# Altium PCB DEMO.PcbDoc
Units mm, origin at the board's own origin, x right, y up, seen from the top; angles counter-clockwise.
Board outline 100 x 100 mm, 2 copper layers (Top Layer, Bottom Layer); 33 components, 19 nets, 75 pads, 4 vias.
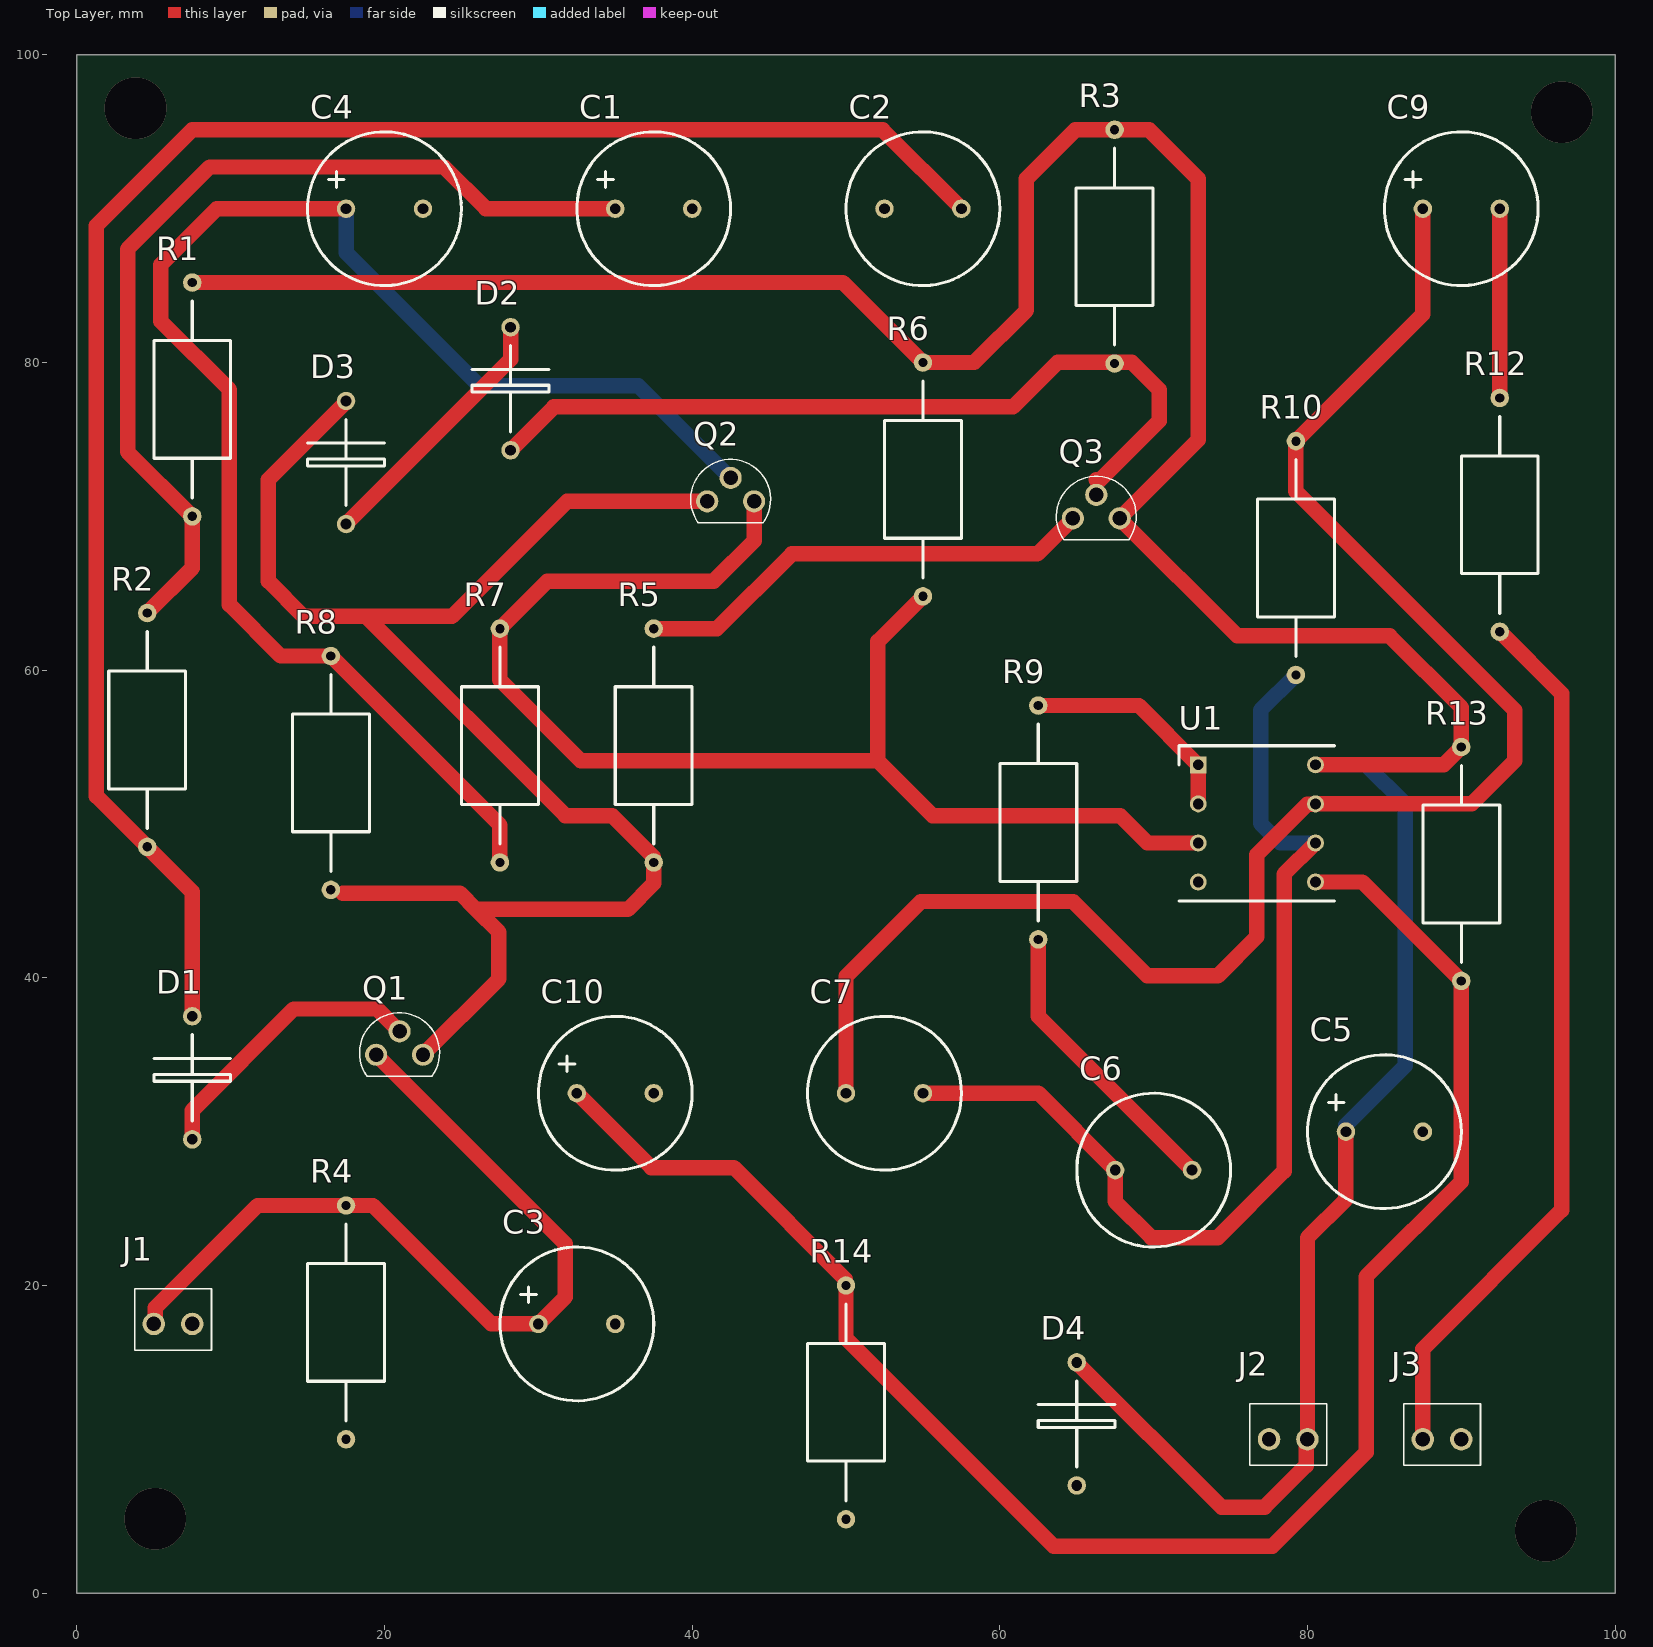
[diagram p0: Top Layer view]
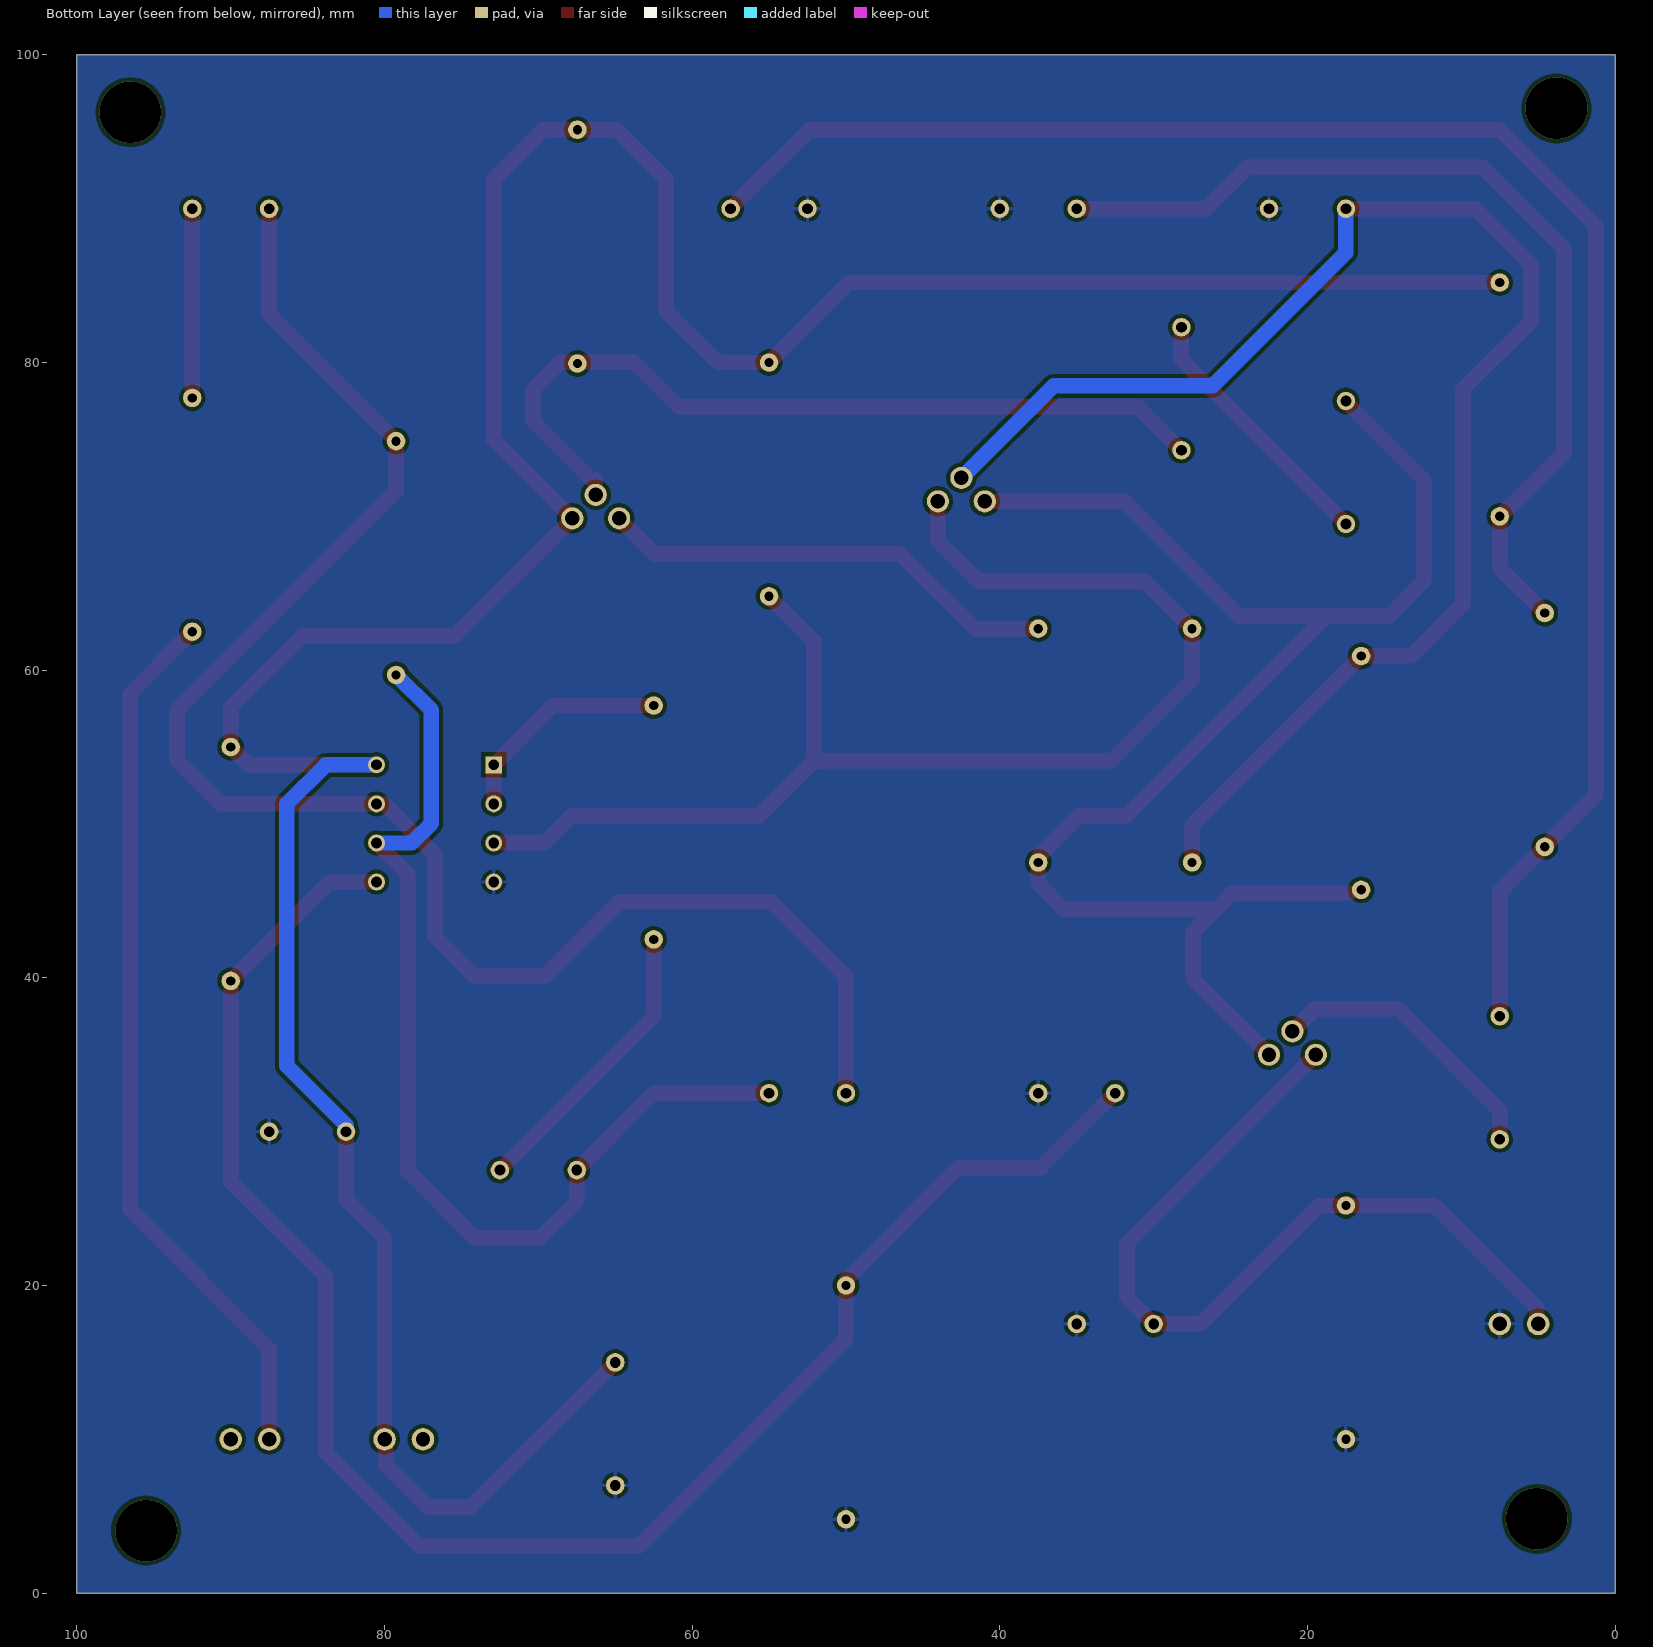
[diagram p1: Bottom Layer view, seen from below]

## Layer stack, top to bottom
Top Solder: solder mask 0.0102, Solder Resist, Dk 3.5
Top Layer: signal copper 0.0356
Dielectric 1: dielectric 0.32, FR-4, Dk 4.8
Bottom Layer: signal copper 0.0356
Bottom Solder: solder mask 0.0102, Solder Resist, Dk 3.5

## Board outline
0,100 100,100 100,0 0,0

## Design rules (kind name [scope] priority, off if disabled: settings)
Clearance [All] p1: gap=0.254 ignorepadtopadclearanceinfootprint=FALSE except(0: Arc-Hole Track-Hole SMDPad-Hole THPad-Hole Via-Hole Fill-Hole Poly-Hole Region-Hole Text-Hole)
HoleSize [All] p1: absolutevalues=TRUE maxlimit=4 minlimit=0.025 maxpercent=80.000 minpercent=20.000
PolygonConnect [All] p1: connectstyle=Relief reliefconductorwidth=0.254 reliefentries=4 polygonreliefangle="90 Angle" airgapwidth=0.254
RoutingVias [All] p1: holewidth=0.711 width=1.27 viastyle="Through Hole" minholewidth=0.711 minwidth=1.27 maxholewidth=0.711 maxwidth=1.27
SolderMaskExpansion [All] p1: expansion=0.102 istentingtop=FALSE
Width [All] p1: maxlimit=1 minlimit=0.254 preferedwidth=1 minimp=50.000000 maximp=50.000000 favimp=50.000000
29 further rules are at their usual default settings.

## Components (designator, comment, footprint, x,y, rotation, side; value= is the part's Value field where it differs from the comment)
C1 "Cap Pol1" "Capacitor - Pol" 35,90 r0 top value=10uF
C2 "Cap" Capacitor 52.5,90 r0 top value=0.1uF
C3 "Cap Pol1" "Capacitor - Pol" 30,17.5 r0 top value=47uF
C4 "Cap Pol1" "Capacitor - Pol" 17.5,90 r0 top value=2.2uF
C5 "Cap Pol1" "Capacitor - Pol" 82.5,30 r0 top value=47uF
C6 "Cap" Capacitor 67.5,27.5 r0 top value=0.01uF
C7 "Cap" Capacitor 50,32.5 r0 top value=47pF
C9 "Cap Pol1" "Capacitor - Pol" 87.5,90 r0 top value=1uF
C10 "Cap Pol1" "Capacitor - Pol" 32.5,32.5 r0 top value=10uF
D1 "Photodiode" Diode 7.5,29.5 r90 top
D2 "Diode 1N5408" Diode 28.194,74.296 r90 top
D3 "Diode 1N5408" Diode 17.5,69.5 r90 top
D4 "Diode 1N5408" Diode 65,7 r90 top
J1 "Jumper" JUMPER 5,17.5 r0 top
J2 "Jumper" JUMPER 77.5,10 r0 top
J3 "Jumper" JUMPER 87.5,10 r0 top
Q1 "JFET-N" TRANSISTOR 19.706,35.127 r0 top
Q2 "NPN" TRANSISTOR 41.23,71.103 r0 top
Q3 "NPN" TRANSISTOR 65,70 r0 top
R1 "Res1" "RES - Axial 0.6" 7.5,70 r90 top value=100K
R2 "Res1" "RES - Axial 0.6" 4.572,48.514 r90 top value=220K
R3 "Res1" "RES - Axial 0.6" 67.464,79.934 r90 top value=47K
R4 "Res1" "RES - Axial 0.6" 17.5,10 r90 top value=10
R5 "Res1" "RES - Axial 0.6" 37.5,47.5 r90 top value=120
R6 "Res1" "RES - Axial 0.6" 55,64.8 r90 top value=15K
R7 "Res1" "RES - Axial 0.6" 27.5,47.5 r90 top value=47K
R8 "Res1" "RES - Axial 0.6" 16.51,45.72 r90 top value=47K
R9 "Res1" "RES - Axial 0.6" 62.5,42.5 r90 top value=2.2K
R10 "Res1" "RES - Axial 0.6" 79.248,74.89 r270 top value=330K
R12 "Res1" "RES - Axial 0.6" 92.5,62.5 r90 top value=47
R13 "Res1" "RES - Axial 0.6" 90,39.8 r90 top value=100K
R14 "Res1" "RES - Axial 0.6" 50,4.8 r90 top value=100K
U1 "LM833N/NOPB" DIP8 72.898,53.848 r0 top

## Footprints (in the part's own frame and the unit in brackets; to place one, negate y for a bottom-side part, rotate by r counter-clockwise, add the part's x,y. Pads: shape width x height; smd on the part's side, far side on the other; paste and mask are expansions set on the pad)
Capacitor [mm]
  round 1.2 hole 0.7: 1(0,0) 2(5,0)
  silkscreen extent -2.5,-5 7.5,5
"Capacitor - Pol" [mm]
  round 1.2 hole 0.7: 1(0,0) 2(5,0)
  silkscreen extent -2.5,-5 7.5,5
Diode [mm]
  round 1.2 hole 0.7: 1(0,0) 2(8,0)
  silkscreen extent 1.2,-2.5 6.8,2.5
DIP8 [mm]
  rect 1.1x1.1 hole 0.7: 1(0,0)
  round 1.1 hole 0.7: 2(0,-2.54) 3(0,-5.08) 4(0,-7.62) 5(7.62,-7.62) 6(7.62,-5.08) 7(7.62,-2.54) 8(7.62,0)
  silkscreen extent -1.24,-8.86 8.86,1.24
JUMPER [mm]
  round 1.462 hole 0.94: 1(0,0) 2(2.5,0)
  silkscreen extent -1.25,-1.7 3.75,2.3, body extent -1.25,-1.7 3.75,2.3, height 7.7
"RES - Axial 0.6" [mm]
  round 1.2 hole 0.6: 1(0,0) 2(15.2,0)
  silkscreen extent 1.2,-2.5 14,2.5
TRANSISTOR [mm]
  round 1.44 hole 0.94: 1(2.794,-0.127) 2(1.27,1.397) 3(-0.254,-0.127)
  silkscreen extent -1.33,-1.53 3.87,2.6

## Part data
C1 C3 C4 C5 C9 C10: "Polarized Capacitor (Radial)", LatestRevisionDate=17-Jul-2002, LatestRevisionNote="Re-released for DXP Platform.", PackageDescription="Polarized Capacitor (Radial); 2 Leads", PackageReference=RB7.6-15, Published=8-Jun-2000, Publisher="Altium Limited"
C2 C6 C7: "Capacitor", LatestRevisionDate=17-Jul-2002, LatestRevisionNote="Re-released for DXP Platform.", PackageDescription="Radial Cap, Thru-Hole; 2 Leads; 0.3 in Pin Spacing", PackageReference=RAD-0.3, Published=8-Jun-2000, Publisher="Altium Limited"
D2 D3 D4: "3 Amp Medium Power Silicon Rectifier Diode", ComponentLink1Description="Manufacturer Link", ComponentLink1URL=http://www.irf.com/, DatasheetVersion=Aug-1984, LatestRevisionDate=17-Jul-2002, LatestRevisionNote="Re-released for DXP Platform.", PackageDescription="Diode, Axial; Body 9.5 x 5.3 mm (LxDia. max), Lead Dia. 1.32 mm (max)", PackageReference=DO-201AD, Published=8-Jun-2000, Publisher="Altium Limited"
Q1: "N-Channel JFET", Code_JEDEC=TO-254-AA, LatestRevisionDate=17-Jul-2002, LatestRevisionNote="Re-released for DXP Platform.", PackageReference=TO-254-AA, Published=8-Jun-2000, Publisher="Altium Limited"
Q2 Q3: "NPN Bipolar Transistor", Code_JEDEC=TO-226-AA, LatestRevisionDate=17-Jul-2002, LatestRevisionNote="Re-released for DXP Platform.", PackageDescription="TO, Flat Index; 3 In-Line, Axial Leads; Body Dia. 4.8mm; Leads 0.55 x 0.51 mm (max)", PackageReference=TO-226-AA, Published=8-Jun-2000, Publisher="Altium Limited"
R1 R2 R3 R4 R5 R6 R7 R8 R9 R10 R12 R13 R14: "Resistor", LatestRevisionDate=17-Jul-2002, LatestRevisionNote="Re-released for DXP Platform.", PackageDescription="Axial Device, Thru-Hole; 2 Leads; 0.3 in Pin Spacing", PackageReference=AXIAL-0.3, Published=8-Jun-2000, Publisher="Altium Limited"
U1: "AUDIO AMPLIFIER", Case/Package=PDIP, Dual Supply Voltage=9V, Input Bias Current=1uA, Input Offset Voltage (Vos)=5mV, Manufacturer="TI National Semiconductor", Max Dual Supply Voltage=18V, Max Operating Temperature=85°C, Min Dual Supply Voltage=5V, Min Operating Temperature=-40°C, Nominal Supply Current=5mA, Output Current=40mA, Package Quantity=40, Power Dissipation=500mW, Power Supply Rejection Ratio (PSRR)=80dB, Supplier Part Number 1=926-LM833N/NOPB, Voltage Gain=110dB, Category="Amplifiers - Op Amps, Buffer, Instrumentation", Common Mode Rejection Ratio=80dB, ComponentLink1Description=https://datasheet.ciiva.com/2973/lm833-n-2973456.pdf?src-supplier=Avnet, ComponentLink1URL=https://datasheet.ciiva.com/2973/lm833-n-2973456.pdf?src-supplier=Avnet, ComponentLink2Description=https://datasheet.ciiva.com/4755/lm833-n-220371-4755091.pdf?src-supplier=Mouser, ComponentLink2URL=https://datasheet.ciiva.com/4755/lm833-n-220371-4755091.pdf?src-supplier=Mouser, ComponentLink3Description=https://datasheet.ciiva.com/1482/1814449-1482436.pdf?src-supplier=Element14, ComponentLink3URL=https://datasheet.ciiva.com/1482/1814449-1482436.pdf?src-supplier=Element14, ComponentLink4Description=https://datasheet.ciiva.com/14153/mnlm833-e-14153231.pdf?src-supplier=Distrelec, ComponentLink4URL=https://datasheet.ciiva.com/14153/mnlm833-e-14153231.pdf?src-supplier=Distrelec, ComponentLink5Description=https://datasheet.ciiva.com/6630/lm833-n-6630645.pdf?src-supplier=Digi-Key, ComponentLink5URL=https://datasheet.ciiva.com/6630/lm833-n-6630645.pdf?src-supplier=Digi-Key, Gain Bandwidth Product=15MHz, Height=3.3mm, Lead Free="Lead Free", Length=9.27mm, Load Impedance=2kR, Manufacturer Part Number=LM833N/NOPB, Mount="Through Hole", Number of Channels=2, Number of Circuits=2, Number of Elements=2, Number of Pins=8, Operating Supply Current=5mA, Operating Supply Voltage=18V, Packaging=Rail/Tube, Pricing 1="1=0.88000, 10=0.79200, 50=0.79200, 100=0.57600, 1000=0.37500, 10000=0.37500 (USD)", Radiation Hardening=No, REACH SVHC="No SVHC", RoHS=Yes, RoHS Compliant=Yes, Series=-, Slew Rate=7V/µs, Stock 1=2883, Supplier 1=Mouser, Supply Current=5mA, Technology=BIPOLAR, Unity Gain Bandwidth Product=15MHz, Weight=0.01lb, Width=6.35mm

## Via types
v1: diameter 4, hole 4, Top Layer to Bottom Layer, 4 vias

## Nets (pads, with @x,y where several pads share a name; then routed paths per layer and width w, separated by ;. In a path a pad name is that pad's centre, name@x,y a point inside that pad or via, vN(x,y) a via of type N, cw(c..) or ccw(c..) an arc to the next point about the centre after c; other vN are vias at no path point)
GND: C1.2 C2.1 C3.2 C4.2 C5.2 C10.2 D4.1 J1.2 R4.1 R14.1 U1.4
NetC1_1: C1.1 R1.1 R2.2 | length 61.6
  Top Layer w1: R2.2 7.5,66.642 R1.1 3.302,74.198 3.302,87.376 8.636,92.71 23.876,92.71 26.586,90 C1.1
NetC2_2: C2.2 D1.2 R2.1 | length 114.9
  Top Layer w1: D1.2 7.5,45.586 1.27,51.816 1.27,88.9 7.493,95.123 52.377,95.123 C2.2
NetC3_1: C3.1 J1.1 Q1.3 R4.2 | length 55.3
  Top Layer w1: J1.1 5.088,17.588 5.088,18.55 11.738,25.2 R4.2 19.25,25.2 26.95,17.5 C3.1 31.75,19.25 31.75,22.702 Q1.3
NetC4_1: C4.1 Q2.2 R7.1 R8.2 | length 97.4
  Top Layer w1: C4.1 9.101,90 5.461,86.36 5.461,82.677 9.906,78.232 9.906,64.262 13.248,60.92 R8.2 27.5,49.93 R7.1
  Bottom Layer w1: C4.1 17.5,87.148 26.162,78.486 36.514,78.486 Q2.2
NetC5_1: C5.1 D4.2 J2.2 Q3.1 R1.2 R3.2 R6.2 R13.2 U1.8 | length 216.7
  Top Layer w1: R1.2 49.8,85.2 R6.2 58.332,80 61.722,83.39 61.722,91.948 64.908,95.134 R3.2 69.712,95.134 72.898,91.948 72.898,74.977 Q3.1 75.437,62.23 85.344,62.23 90,57.574 R13.2 88.848,53.848 U1.8 ; D4.2 74.412,5.588 77.216,5.588 79.912,8.284 79.912,9.912 J2.2 80,13.345 80,23.104 82.5,25.604 C5.1
  Bottom Layer w1: U1.8 83.82,53.848 86.36,51.308 86.36,34.29 82.5,30.43 C5.1
NetC6_1: C6.1 C7.2 R10.2 U1.6 | length 67.2
  Top Layer w1: C7.2 62.5,32.5 C6.1 67.5,25.464 69.85,23.114 74.168,23.114 78.486,27.432 78.486,46.736 U1.6
  Bottom Layer w1: R10.2 76.962,57.404 76.962,50.038 78.232,48.768 U1.6
NetC6_2: C6.2 R9.1 | length 19.1
  Top Layer w1: R9.1 62.5,37.5 C6.2
NetC7_1: C7.1 C9.1 R10.1 U1.7 | length 109.2
  Top Layer w1: C7.1 50,40.094 54.864,44.958 64.77,44.958 69.596,40.132 74.168,40.132 76.708,42.672 76.708,48.006 79.991,51.289 80.499,51.289 U1.7 90.678,51.308 93.472,54.102 93.472,57.404 79.248,71.628 R10.1 87.5,83.142 C9.1
NetC9_2: C9.2 R12.2 | length 12.3
  Top Layer w1: R12.2 C9.2
NetC10_1: C10.1 R13.1 R14.2 U1.5 | length 113.6
  Top Layer w1: C10.1 37.346,27.654 42.704,27.654 49.962,20.396 49.962,20.038 R14.2 50,16.548 63.5,3.048 77.724,3.048 83.82,9.144 83.82,20.574 90,26.754 R13.1 83.572,46.228 U1.5
NetD1_1: D1.1 Q1.2 | length 18.7
  Top Layer w1: D1.1 7.5,31.376 14.097,37.973 19.527,37.973 Q1.2
NetD2_1: D2.1 Q3.2 R3.1 | length 53
  Top Layer w1: D2.1 31.013,77.115 60.859,77.115 63.754,80.01 68.58,80.01 70.358,78.232 70.358,76.2 66.548,72.39 66.27,72.39
NetD2_2: D2.2 D3.1 | length 17.2
  Top Layer w1: D3.1 25.462,77.462 28.194,80.194 D2.2
NetD3_2: D3.2 Q1.1 Q2.3 R5.1 R8.1 | length 106.7
  Top Layer w1: 17.272,45.506 24.892,45.506 25.948,44.45 ; D3.2 17.5,77.446 17.4,77.346 17.4,77.344 12.446,72.39 12.446,65.786 14.732,63.5 18.796,63.5 ; Q1.1 27.432,39.932 27.432,42.966 25.948,44.45 ; Q2.3 31.86,70.976 24.384,63.5 18.796,63.5 ; 18.796,63.5 31.75,50.546 34.798,50.546 37.462,47.882 37.462,47.538 R5.1 37.5,46.136 35.814,44.45 25.948,44.45
NetJ3_1: J3.1 R12.1 | length 57.9
  Top Layer w1: J3.1 87.5,15.872 96.52,24.892 96.52,58.48 R12.1
NetQ2_1: Q2.1 R6.1 R7.2 U1.3 | length 86.5
  Top Layer w1: Q2.1 44.024,68.408 41.402,65.786 30.586,65.786 R7.2 27.5,59.368 32.766,54.102 52.07,54.102 ; R6.1 52.07,61.87 52.07,54.102 ; U1.3 69.596,48.768 67.818,50.546 55.626,50.546 52.07,54.102
NetQ3_3: Q3.3 R5.2 | length 30.2
  Top Layer w1: R5.2 41.613,62.7 46.477,67.564 62.437,67.564 Q3.3
NetR9_2: R9.2 U1.1 U1.2 | length 14.5
  Top Layer w1: R9.2 69.046,57.7 U1.1 U1.2
pads on no net: J2.1 J3.2
copper on no net:
  other v1: 95.504,4.064 5.08,4.826 96.52,96.266 3.81,96.52

## Polygon pours and split planes (outlines as drawn)
GND on Bottom Layer "GND_L02_P000" (solid, pour order 0): 0,100 100,100 100,0 0,0

## Silkscreen, mask and mechanical layers (free items; w line width, h text height)
Mechanical 1:
  drawing of 4233 lines, arcs and shapes, not listed